# Altium PCB PCB2.PcbDoc
Units mm, origin at the board's own origin, x right, y up, seen from the top; angles counter-clockwise.
Board outline 70 x 20 mm, 2 copper layers (Top Layer, Bottom Layer); 6 components, 9 nets, 81 pads, 7 vias.
Unrouted connection lines stored in the file: 3.
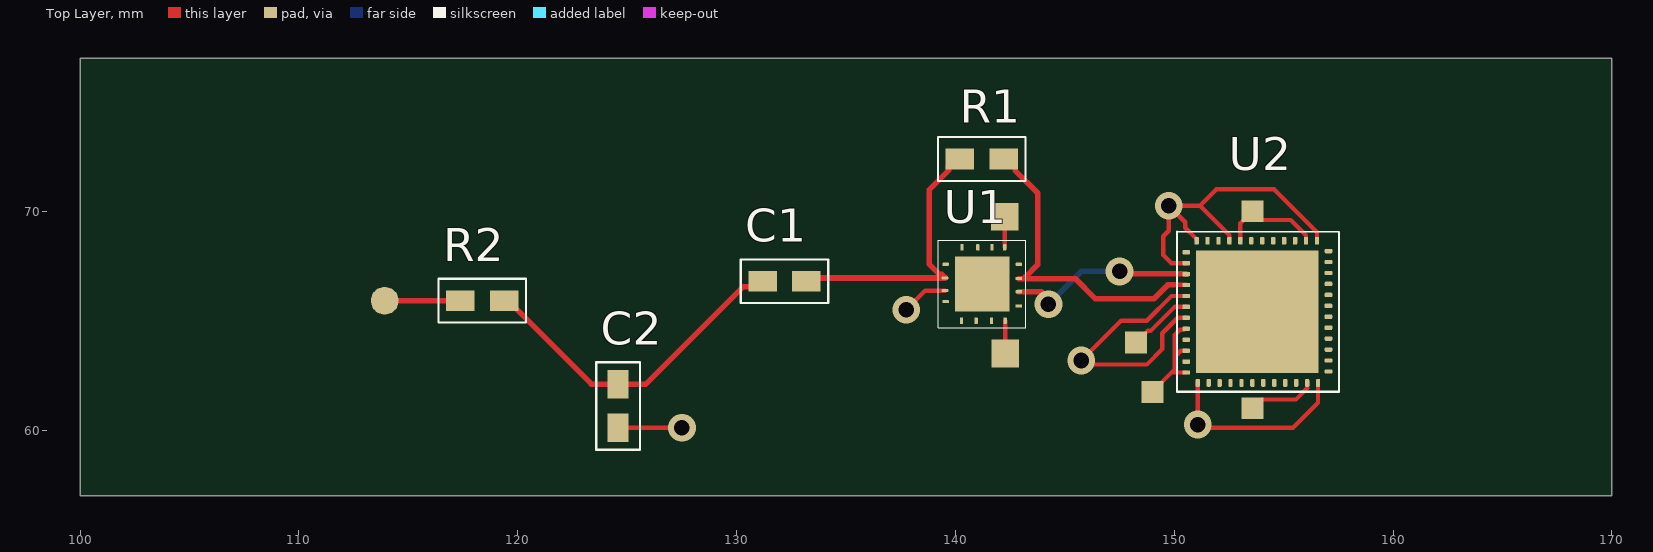
[diagram p0: Top Layer view]
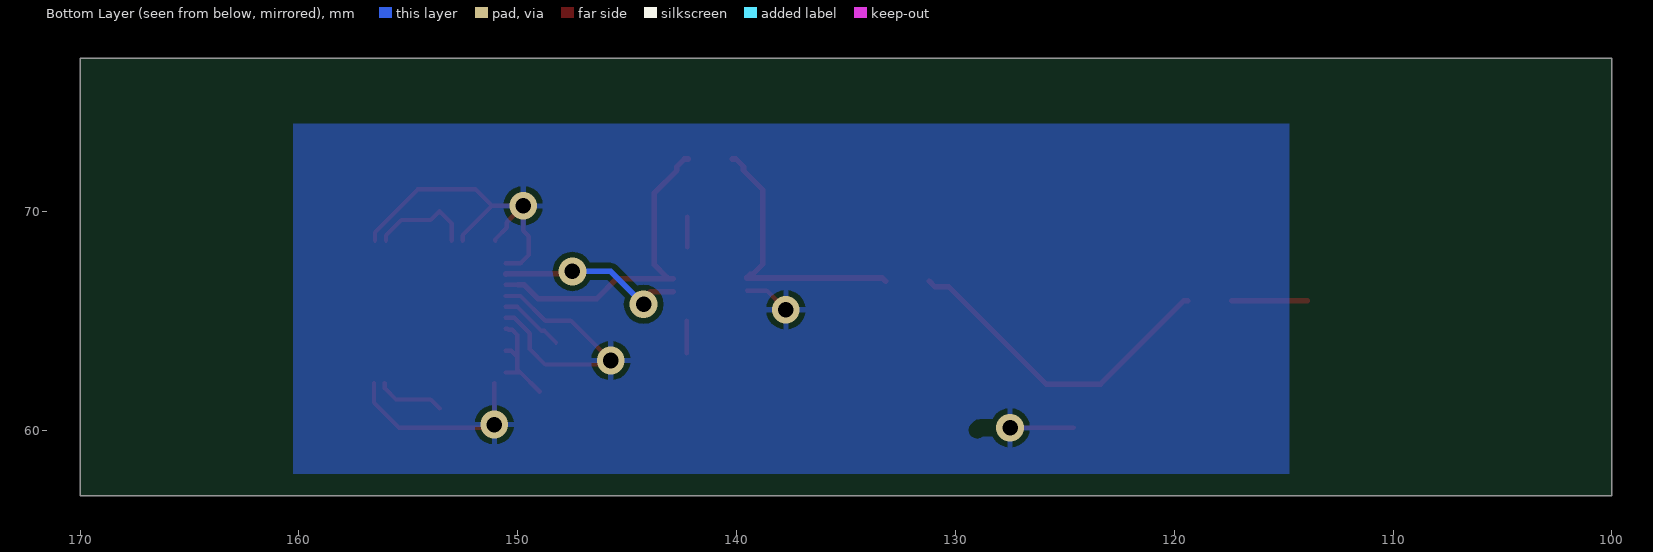
[diagram p1: Bottom Layer view, seen from below]

## Layer stack, top to bottom
Top Solder: solder mask 0.0102, Solder Resist, Dk 3.5
Top Layer: signal copper 0.0356
Dielectric 1: dielectric 0.32, FR-4, Dk 4.8
Bottom Layer: signal copper 0.0356
Bottom Solder: solder mask 0.0102, Solder Resist, Dk 3.5

## Board outline
100,57 170,57 170,77 100,77

## Design rules (kind name [scope] priority, off if disabled: settings)
Clearance [All] p1: gap=0.254 ignorepadtopadclearanceinfootprint=FALSE except(0: Arc-Hole Track-Hole SMDPad-Hole THPad-Hole Via-Hole Fill-Hole Poly-Hole Region-Hole Text-Hole)
PolygonConnect [All] p1: connectstyle=Relief reliefconductorwidth=0.254 reliefentries=4 polygonreliefangle="90 Angle" airgapwidth=0.254
RoutingVias [All] p1: holewidth=0.711 width=1.27 viastyle="Through Hole" minholewidth=0.711 minwidth=1.27 maxholewidth=0.711 maxwidth=1.27
SolderMaskExpansion [All] p1: expansion=0.102
Width [All] p1: maxlimit=0.3 minlimit=0.2 preferedwidth=0.254 toplayer_prefwidth=0.2 bottomlayer_minwidth=0.254 bottomlayer_maxwidth=0.254 minimp=50.000000 maximp=50.000000 favimp=50.000000
30 further rules are at their usual default settings.

## Classes and differential pairs
component class V_3: C1 C2 R1 R2 U1

## Components (designator, comment, footprint, x,y, rotation, side; value= is the part's Value field where it differs from the comment)
C1 "4p7" C_0805 133.191,66.802 r180 top
C2 "3p" C_0805 124.587,60.103 r90 top
R1 "1K" R_0805 140.208,72.39 r0 top
R2 "5K8" R_0805 117.38,65.913 r0 top
U1 "Operational Amplifier" ADA4932-1 141.224,66.675 r0 top
U2 "ADC" ADS61B49 153.797,65.405 r270 top

## Footprints (in the part's own frame and the unit in brackets; to place one, negate y for a bottom-side part, rotate by r counter-clockwise, add the part's x,y. Pads: shape width x height; smd on the part's side, far side on the other; paste and mask are expansions set on the pad)
ADA4932-1 [mm]
  rrect50% 0.3x0.15 smd: 1(-1.675,0.9) 2(-1.7,0.275) 3(-1.7,-0.3) 4(-1.675,-0.8) 9(1.675,-1) 10(1.675,-0.35) 11(1.675,0.25) 12(1.675,0.9)
  rrect50% 0.15x0.3 smd: 5(-0.95,-1.675) 6(-0.275,-1.675) 7(0.425,-1.675) 8(1.05,-1.675) 13(1.025,1.675) 14(0.45,1.675) 15(-0.2,1.675) 16(-0.925,1.675)
  rect 2.5x2.5 smd: 17(0,0)
  silkscreen extent -2,-2 2,2
ADS61B49 [mm]
  rrect50% 0.35x0.2 smd: 1(-3.25,2.725) 2(-3.25,2.225) 3(-3.25,1.725) 4(-3.25,1.225) 5(-3.25,0.725) 6(-3.25,0.225) 7(-3.25,-0.275) 8(-3.25,-0.775) 9(-3.25,-1.275) 10(-3.25,-1.775) 11(-3.25,-2.275) 12(-3.25,-2.775) 25(3.25,-2.725) 26(3.25,-2.225) 27(3.25,-1.725) 28(3.25,-1.225) 29(3.25,-0.725) 30(3.25,-0.225) 31(3.25,0.275) 32(3.25,0.775) 33(3.25,1.275) 34(3.25,1.775) 35(3.25,2.275) 36(3.25,2.775)
  rrect50% 0.2x0.35 smd: 13(-2.725,-3.25) 14(-2.225,-3.25) 15(-1.725,-3.25) 16(-1.225,-3.25) 17(-0.725,-3.25) 18(-0.225,-3.25) 19(0.275,-3.25) 20(0.775,-3.25) 21(1.275,-3.25) 22(1.775,-3.25) 23(2.275,-3.25) 24(2.775,-3.25) 37(2.725,3.25) 38(2.225,3.25) 39(1.725,3.25) 40(1.225,3.25) 41(0.725,3.25) 42(0.225,3.25) 43(-0.275,3.25) 44(-0.775,3.25) 45(-1.275,3.25) 46(-1.775,3.25) 47(-2.275,3.25) 48(-2.775,3.25)
  rect 5.6x5.6 smd: 49(0,0)
  silkscreen extent -3.67,-3.67 3.65,3.72
C_0805 [mm]
  rect 1.3x0.95 smd: 3(0,0) 4(2,0)
  silkscreen extent -1,-1 3,1
R_0805 [mm]
  rect 1.3x0.95 smd: 1(0,0) 2(2,0)
  silkscreen extent -1,-1 3,1

## Part data
C1 C2: library part Condenser
R1 R2: library part Resistor

## Free pads (board coordinates)
  round 1.27 smd: 5(113.919,65.913)
  rect 1.27x1.27 smd: 8(142.274,63.5) 9(142.25,69.75)
  rect 1x1 smd: 10(153.572,70) 11(153.572,61) 12(149,61.75) 13(148.25,64)

## Via types
v1: diameter 1.27, hole 0.711, Top Layer to Bottom Layer, 7 vias

## Nets (pads, with @x,y where several pads share a name; then routed paths per layer and width w, separated by ;. In a path a pad name is that pad's centre, name@x,y a point inside that pad or via, vN(x,y) a via of type N, cw(c..) or ccw(c..) an arc to the next point about the centre after c; other vN are vias at no path point)
"3.3 B": pad.10 pad.11 pad.12 pad.13 U2.2 U2.8 U2.18 U2.20 U2.22 U2.24 U2.35 | length 15.8
  Top Layer w0.2: pad.13 148.796,64.546 148.933,64.546 150.017,65.63 U2.18 ; pad.12 149.88,62.63 ; U2.24 149.88,62.63 ; U2.22 150.301,63.63 150.018,63.347 ; U2.20 150.472,64.63 150.426,64.584 150.255,64.584 150.018,64.347 150.018,63.347 ; U2.8 153.022,69.45 pad.10 153.972,69.6 155.323,69.6 156.022,68.901 U2.2 ; pad.11 153.972,61.4 155.563,61.4 156.072,61.909 U2.35 ; 149.88,62.63 150.018,62.768 150.018,63.347
"+5 B": pad.8 U1.8 | length 1.5
  Top Layer w0.2: pad.8 U1.8
"-5 B": pad.9 U1.13 | length 1.4
  Top Layer w0.2: U1.13 142.249,69.749 pad.9
GND: C2.3 U1.3 U2.1 U2.9 U2.12 U2.14 U2.17 U2.19 U2.25 U2.36 | length 42.1
  Top Layer w0.2: C2.3 v1(127.5,60.103) ; v1(137.75,65.5) 138.625,66.375 U1.3 ; v1(145.75,63.18) 145.93,63 148.751,63 149.455,63.704 149.455,64.426 150.159,65.13 U2.19 ; v1@145.809,63.239 147.57,65 148.745,65 149.875,66.13 U2.17 ; U2.14 149.87,67.63 149.5,68 149.5,68.855 149.75,69.105 v1(149.75,70.25) ; U2.12 151.022,68.73 150.501,69.251 150.501,69.499 v1(149.75,70.25) ; U2.25 v1(151.072,60.25) 151.219,60.103 155.425,60.103 156.572,61.25 U2.36 ; U2.9 152.522,68.901 151.173,70.25 ; U2.1 156.522,69.043 154.565,71 151.923,71 151.173,70.25 ; v1(149.75,70.25) 151.173,70.25
NetC1_3: C1.3 R1.1 U1.2 | length 12.9
  Top Layer w0.254: C1.3 133.339,66.95 U1.2 139.524,66.979 139.384,67.119 139.263,67.119 138.811,67.571 138.811,70.993 139.685,71.867 139.685,72.042 140.033,72.39 R1.1
NetC1_4: C1.4 C2.4 R2.2 | length 15.3
  Top Layer w0.254: R2.2 119.555,65.913 123.365,62.103 C2.4 125.857,62.103 130.302,66.548 130.937,66.548 C1.4
NetR1_2: R1.2 U1.11 U2.16 | length 14.7
  Top Layer w0.2: 149.991,66.641 U2.16@150.547,66.641
  Top Layer w0.254: R1.2 142.383,72.39 142.731,72.042 142.731,71.867 143.764,70.834 143.764,67.564 143.177,66.977 ; U1.11 143.177,66.925 145.475,66.925 146.4,66 149.064,66 149.705,66.641 149.991,66.641
NetR2_1: pad.5 R2.1 | length 3.5
  Top Layer w0.254: pad.5 R2.1
NetU1_10: U1.10 U2.15 | length 8.7
  Top Layer w0.254: U1.10 143.925,66.325 144.25,66 v1(144.25,65.75) ; v1(147.5,67.25) 147.601,67.149 150.528,67.149 U2.15
  Bottom Layer w0.254: v1(144.25,65.75) 145.75,67.25 v1(147.5,67.25)
pads on no net: U1.1 U1.4 U1.5 U1.6 U1.7 U1.9 U1.12 U1.14 U1.15 U1.16 U1.17 U2.3 U2.4 U2.5 U2.6 U2.7 U2.10 U2.11 U2.13 U2.21 U2.23 U2.26 U2.27 U2.28 U2.29 U2.30 U2.31 U2.32 U2.33 U2.34 U2.37 U2.38 U2.39 U2.40 U2.41 U2.42 U2.43 U2.44 U2.45 U2.46 U2.47 U2.48 U2.49

## Polygon pours and split planes (outlines as drawn)
GND on Bottom Layer (solid, pour order 20): 114.75,74 114.75,58 160.25,58 160.25,74
GND on Bottom Layer (solid, pour order 16): 134.5,62
GND on Bottom Layer (solid, pour order 14): 137.5,51.75
GND on Bottom Layer (solid, pour order 12): 137.5,51.5
"3.3 B" on Bottom Layer "Bottom Layer-3.3 B 1" (solid, pour order 6): 150,65.75